# Altium PCB PCB_y262lpt v0.3b_2022-03-30.pcbdoc
Units mil, origin at the board's own origin, x right, y up, seen from the top; angles counter-clockwise.
Board outline 4055 x 3740 mil, 2 copper layers (Top Layer, Bottom Layer); 27 components, 38 nets, 162 pads, 8 vias.
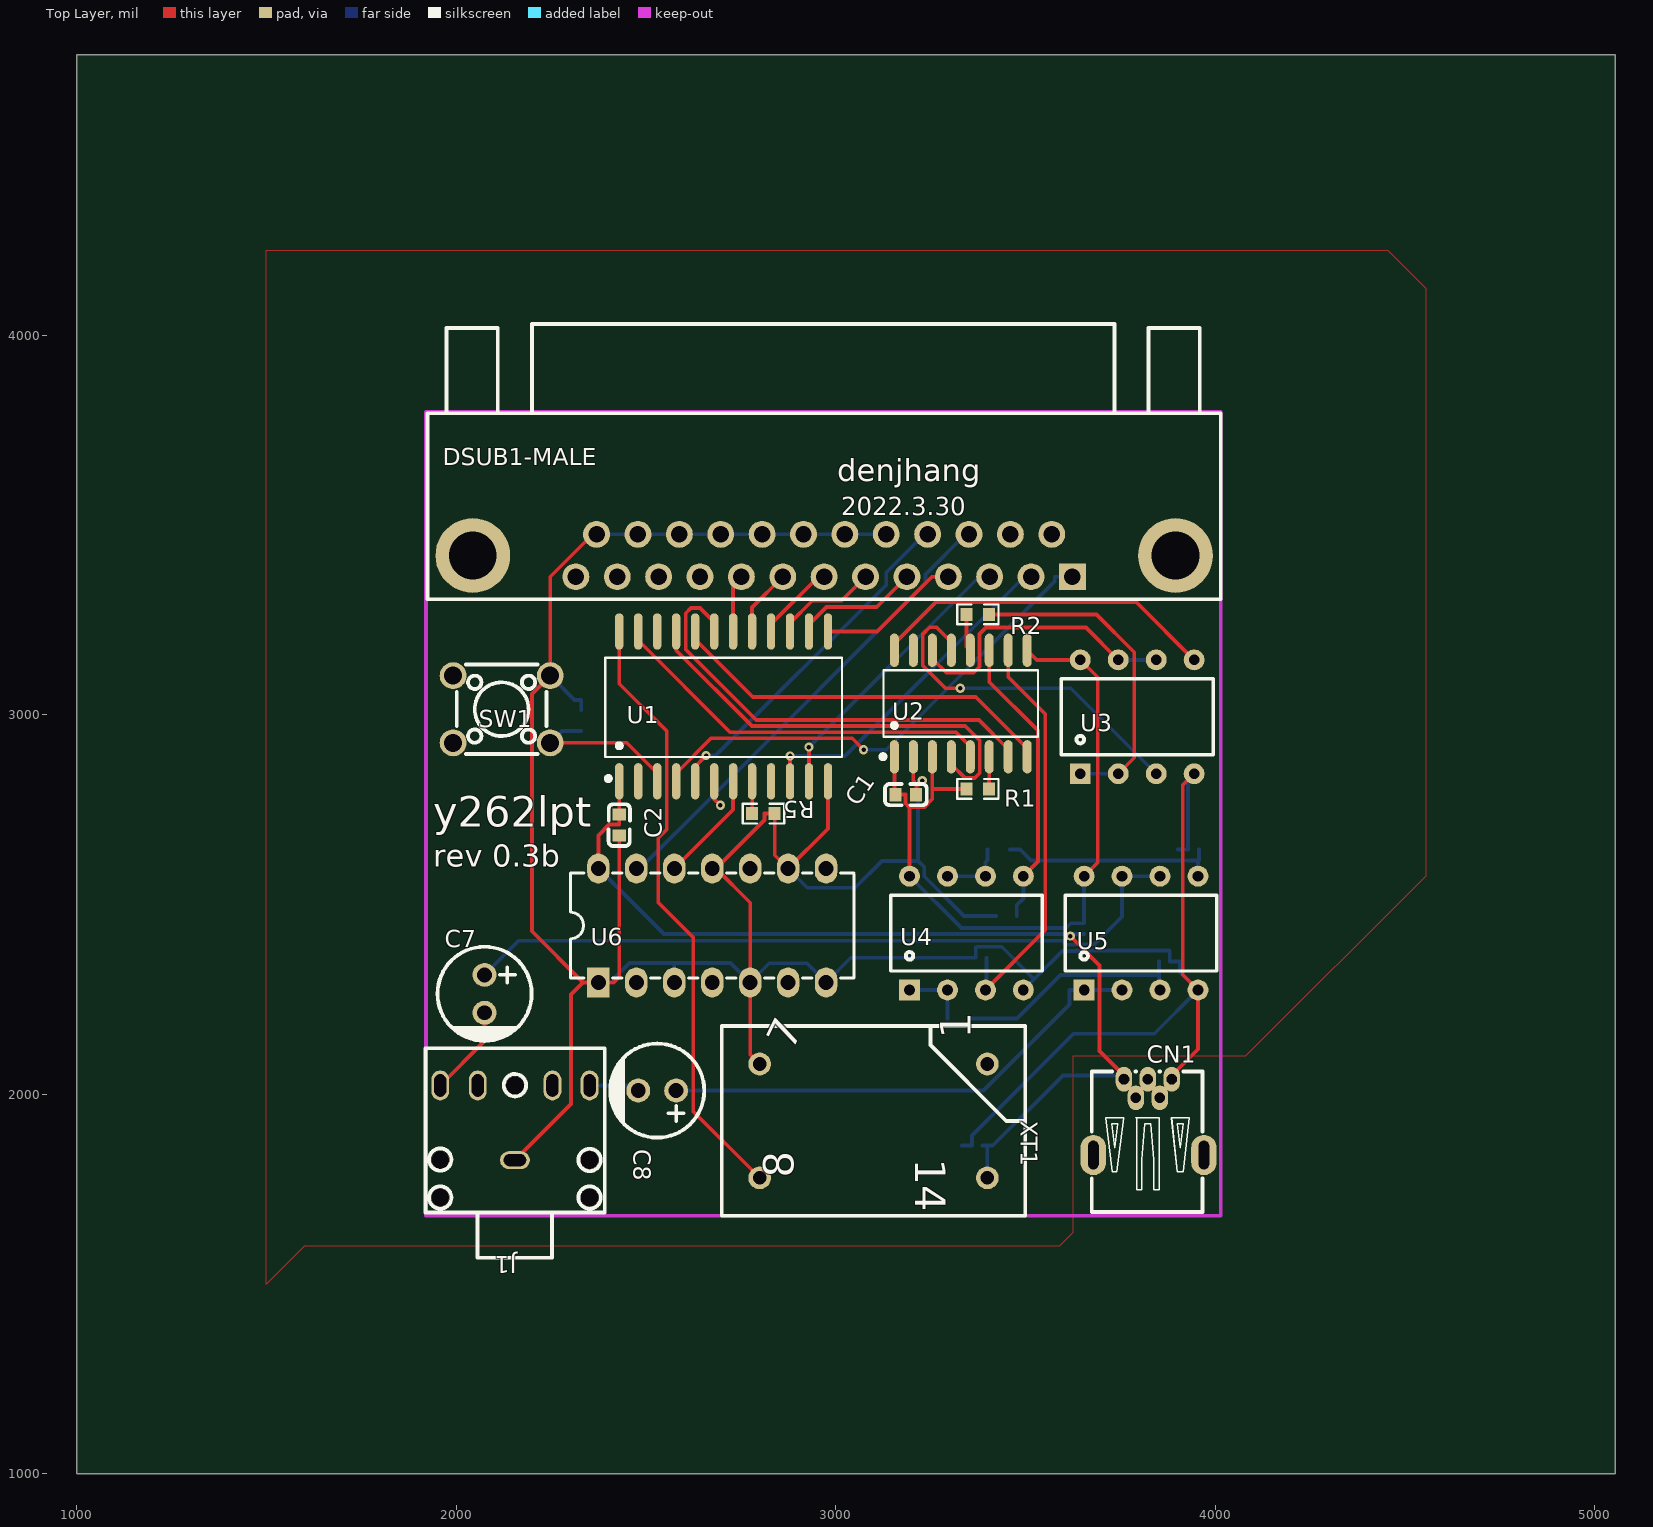
[diagram p0: Top Layer view]
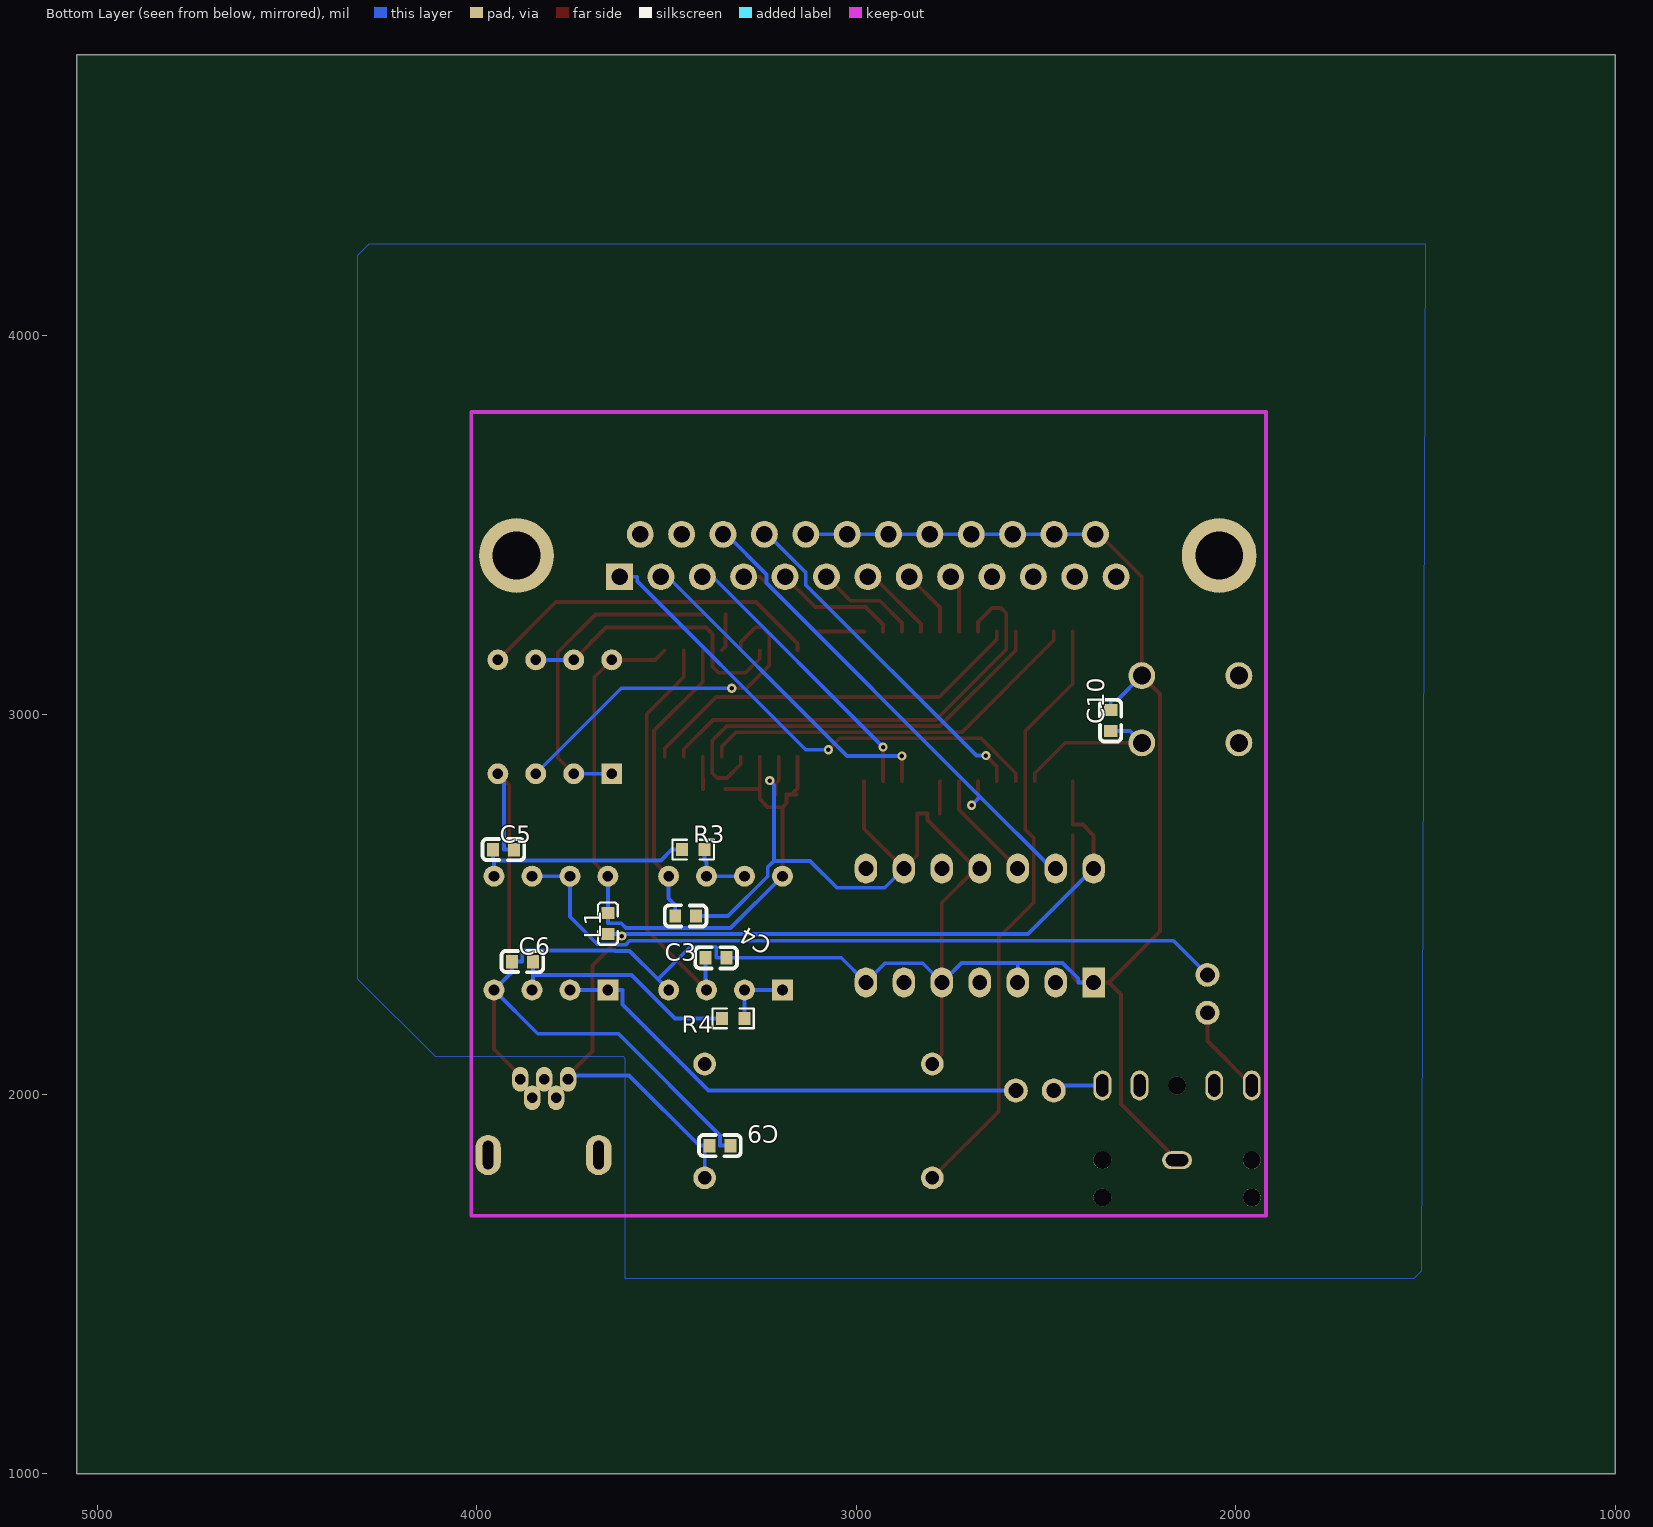
[diagram p1: Bottom Layer view, seen from below]

## Layer stack, top to bottom
Top Layer: signal copper (thickness not stored)
Dielectric: dielectric 12.6, FR-4, Dk 4.8
Bottom Layer: signal copper (thickness not stored)

## Board outline
5055,1000 1000,1000 1000,4740 5055,4740

## Components (designator, comment, footprint, x,y, rotation, side; value= is the part's Value field where it differs from the comment)
C1 "0.1u" C0603#1 3185,2790 r180 top
C2 "0.1u" C0603#1 2430,2710 r90 top
C3 "1.5n" C0603#2 3450,2470 r0 bottom
C4 "1.5n" C0603#2 3370,2360 r180 bottom
C5 "10n" C0603#2 3930,2645 r0 bottom
C6 "10n" C0603#2 3880,2350 r0 bottom
C7 "4.7uF" CAP-TH_BD6.3-P2.50-D1.0-FD 2075,2265 r270 top
C8 "4.7uF" CAP-TH_BD6.3-P2.50-D1.0-FD 2530,2010 r180 top
C9 "0.1u" C0603#2 3360,1865 r180 bottom
C10 "2.2n" C0603#2 2330,2985 r270 bottom
CN1 "54819-0519" USB-MINI-SMD_5P-P0.80-H-F_54819-0519 3825,1945 r0 top
DSUB1-MALE "FDB2501-M0DB300K6KA" DB25-TH_FDB2501-M0DB300K6KA 2969.96,3420.01 r180 top
J1 "PJ-307C" AUDIO-TH_PJ307C 2155,1925 r180 top
L1 "100Ω" L0603 3655,2450 r270 bottom
R1 "4.7k" R0603#1 3375,2805 r0 top
R2 "100R" R0603#1 3375,3265 r180 top
R3 "1.8k" R0603#2 3430,2645 r0 bottom
R4 "1.8k" R0603#2 3325,2200 r0 bottom
R5 "10k" R0603#1 2810,2740 r180 top
SW1 "C13828" SW-TH_4P-L6.0-W6.0-P4.50-LS6.5 2120,3015 r180 top
U1 "YMF262-M" YMF262-M 2705,3020 r0 top
U2 "YAC512" SOP-16_L10.3-W5.4-P1.27-LS7.8-BL 3330,3030 r0 top
U3 "SA5532AP" DIP8 3795,2995 r0 top
U4 "SA5532AP" DIP8 3345,2425 r0 top
U5 "SA5532AP" DIP8 3805,2425 r0 top
U6 "SN74HCT04N" DIP-14_L19.0-W7.0-P2.54-LS7.6-BL 2675,2445 r0 top
XT1 "TCXO-DIP14" TCXO-DIP-14-FOOT 3100,1930 r270 top

## Footprints (in the part's own frame and the unit in brackets; to place one, negate y for a bottom-side part, rotate by r counter-clockwise, add the part's x,y. Pads: shape width x height; smd on the part's side, far side on the other; paste and mask are expansions set on the pad)
AUDIO-TH_PJ307C [mm]
  oval 2x1.2 hole 0.8 slot 1.5 at 0 deg: 1(0,2.5)
  oval 1.2x2 hole 0.8 slot 1.5 at 90 deg: 2(5,-2.5) 3(2.489,-2.5) 4(-2.511,-2.5) 5(-5,-2.5)
  round 1.2 hole 1.2 unplated: ""(-5,5) ""(-5,2.5) ""(0,-2.5) ""(5,5) ""(5,2.5)
  silkscreen extent -6.01,-4.99 5.99,9.03
C0603#1 [mm]
  rect 0.8x0.9 smd: 1(-0.7,0) 2(0.7,0)
  silkscreen extent -1.41,-0.71 1.39,0.72
C0603#2 [mm]
  rect 0.8x0.9 smd: 1(0.7,0) 2(-0.7,0)
  silkscreen extent -1.39,-0.72 1.41,0.71
CAP-TH_BD6.3-P2.50-D1.0-FD [mm]
  round 1.6 hole 1: 1(-1.27,0) 2(1.27,0)
  silkscreen extent -3.15,-3.15 3.17,3.15
DB25-TH_FDB2501-M0DB300K6KA [mm]
  rect 1.8x1.8 hole 1.1: 1(-16.62,1.42)
  round 1.8 hole 1.1: 2(-13.85,1.42) 3(-11.08,1.42) 4(-8.31,1.42) 5(-5.54,1.42) 6(-2.77,1.42) 7(0,1.42) 8(2.77,1.42) 9(5.54,1.42) 10(8.31,1.42) 11(11.08,1.42) 12(13.85,1.42) 13(16.62,1.42) 14(-15.235,-1.42) 15(-12.465,-1.42) 16(-9.695,-1.42) 17(-6.925,-1.42) 18(-4.155,-1.42) 19(-1.385,-1.42) 20(1.385,-1.42) 21(4.155,-1.42) 22(6.925,-1.42) 23(9.695,-1.42) 24(12.465,-1.42) 25(15.235,-1.42)
  round 5 hole 3.2: 26(-23.52,0) 27(23.52,0)
  silkscreen extent -26.54,-15.49 26.54,2.92
DIP8 [mil]
  rect 55x55 hole 28: 1(-150,-150)
  round 55 hole 28: 2(-50,-150) 3(50,-150) 4(150,-150) 5(150,150) 6(50,150) 7(-50,150) 8(-150,150)
  silkscreen extent -200,-100 200,100
DIP-14_L19.0-W7.0-P2.54-LS7.6-BL [mm]
  rect 1.5x2 hole 1: 1(-7.62,-3.81)
  oval 1.5x2 hole 1: 2(-5.08,-3.81) 3(-2.54,-3.81) 4(0,-3.81) 5(2.54,-3.81) 6(5.08,-3.81) 7(7.62,-3.81) 8(7.62,3.81) 9(5.08,3.81) 10(2.54,3.81) 11(0,3.81) 12(-2.54,3.81) 13(-5.08,3.81) 14(-7.62,3.81)
  silkscreen extent -9.5,-3.5 9.5,3.5
L0603 [mm]
  rect 0.8x0.864 smd: 1(0.7,0) 2(-0.7,0)
  silkscreen extent -1.41,-0.67 1.42,0.65
R0603#1 [mil]
  rect 31.75x34.02 smd: 1(-29.66,0) 2(29.66,0)
  silkscreen extent -55,-26 55,26
R0603#2 [mil]
  rect 31.75x34.02 smd: 1(29.66,0) 2(-29.66,0)
  silkscreen extent -55,-26 55,26
SOP-16_L10.3-W5.4-P1.27-LS7.8-BL [mil]
  oval 23.7x87.83 smd: 1(-175,-140.37) 2(-125,-140.37) 3(-75,-140.37) 4(-25,-140.37) 5(25,-140.37) 6(75,-140.37) 7(125,-140.37) 8(175,-140.37) 9(175,140.37) 10(125,140.37) 11(75,140.37) 12(25,140.37) 13(-25,140.37) 14(-75,140.37) 15(-125,140.37) 16(-175,140.37)
  silkscreen extent -211,-146 204,87
SW-TH_4P-L6.0-W6.0-P4.50-LS6.5 [mm]
  round 1.8 hole 1.2: 1(-3.25,2.25) 2(3.25,2.25) 3(-3.25,-2.25) 4(3.25,-2.25)
  silkscreen extent -3,-3 3,3
TCXO-DIP-14-FOOT [mil]
  round 60 hole 36: 1(-150,300) 7(-150,-300) 8(150,-300) 14(150,300)
  silkscreen extent -250,-400 250,400
USB-MINI-SMD_5P-P0.80-H-F_54819-0519 [mm]
  oval 1.1x1.65 hole 0.7 slot 0.705 at 90 deg: 1(-1.65,2.409) 5(1.55,2.409)
  oval 1.1x1.65 hole 0.7: 2(-0.848,1.166) 3(-0.05,2.409) 4(0.752,1.166)
  oval 1.7x2.7 hole 0.7 slot 1.901 at 90 deg: 6(3.7,-2.664) 7(-3.7,-2.664)
  silkscreen extent -3.81,-6.48 3.6,2.92
YMF262-M [mm]
  oval 0.56x2.432 smd: 1(-6.985,-4.953) 2(-5.715,-4.953) 3(-4.445,-4.953) 4(-3.175,-4.953) 5(-1.905,-4.953) 6(-0.635,-4.953) 7(0.635,-4.953) 8(1.905,-4.953) 9(3.175,-4.953) 10(4.445,-4.953) 11(5.715,-4.953) 12(6.985,-4.953) 13(6.985,5.08) 14(5.715,5.08) 15(4.445,5.08) 16(3.175,5.08) 17(1.905,5.08) 18(0.635,5.08) 19(-0.635,5.08) 20(-1.905,5.08) 21(-3.175,5.08) 22(-4.445,5.08) 23(-5.715,5.08) 24(-6.985,5.08)
  silkscreen extent -7.92,-4.92 7.92,3.32

## Via types
v1: diameter 24.02, hole 12.01, Top Layer to Bottom Layer, tented both sides, 8 vias

## Nets (pads, with @x,y where several pads share a name; then routed paths per layer and width w, separated by ;. In a path a pad name is that pad's centre, name@x,y a point inside that pad or via, vN(x,y) a via of type N, cw(c..) or ccw(c..) an arc to the next point about the centre after c; other vN are vias at no path point)
/CS: R5.2 U1.8 | length 85.1
  Top Layer w10: U1.8 2780.34,2824.66 R5.2
/IC: C10.1 SW1.1 U1.3 | length 431.4
  Top Layer w10: SW1.1 2449.79,2926.42 2530,2846.21 U1.3
  Bottom Layer w10: SW1.1 2278.97,2957.44 C10.1
/RD: U1.7 U6.12 | length 294.2
  Top Layer w10: U6.12 2730,2750 U1.7
/WR: DSUB1-MALE.16 U1.6 U6.13 | length 1356.4
  Top Layer w10: U1.6 2680,2778.31 v1(2696.35,2761.96)
  Bottom Layer w10: U6.13 2484.72,2595 2674.02,2784.3 ; v1(2696.35,2761.96) 2674.02,2784.3 ; DSUB1-MALE.16@3351.65,3475.91 3342.69,3475.91 3236.93,3370.15 3236.93,3347.21 2674.02,2784.3
A0: DSUB1-MALE.1 U1.4 | length 1311.8
  Top Layer w10: U1.4 2580,2846.38 2671.98,2938.36 3043.99,2938.36 v1(3074.03,2908.32)
  Bottom Layer w10: v1(3074.03,2908.32) 3133.69,2908.32 3577.87,3352.5 3577.87,3364.1 DSUB1-MALE.1
A1: DSUB1-MALE.17 U1.5 | length 924.2
  Top Layer w10: U1.5 2630,2863.77 v1(2658.91,2892.68)
  Bottom Layer w10: v1(2658.91,2892.68) 2683.77,2892.68 3133.55,3342.46 3133.55,3375.33 3234.13,3475.91 DSUB1-MALE.17
A.VCC: C1.2 L1.2 R1.1 U2.1 U2.3 U2.9 U3.8 U4.8 U5.8 | length 2023.4
  Top Layer w10: U2.1 3155,2805.81 C1.2@3170.81,2790 ; C1.2 C1.2@3170.81,2790 ; U4.8 3195,2756.38 ; U2.3 3255,2805 ; R1.1 3318.48,2805 3255,2805 ; U2.9 3530.37,3145 U3.8 3690.85,3099.15 3690.85,2610.85 U5.8 ; C1.2@3170.81,2790 3184.18,2790 3184.18,2767.2 3195,2756.38 ; 3195,2756.38 3233.17,2756.38 3255,2778.21 3255,2805
  Bottom Layer w10: U4.8 3331.5,2438.5 3607.4,2438.5 3619.72,2450.82 3655.01,2450.82 L1.2 U5.8
AOUT: U2.13 U3.3 | length 936.3
  Top Layer w10: U2.13 3305,3191.91 3266,3230.91 3248.07,3230.91 3230,3212.84 3230,3129.55 3289.33,3070.22 v1(3328.74,3070.22)
  Bottom Layer w10: v1(3328.74,3070.22) 3619.78,3070.22 U3.3
CH1: C4.2 U2.10 U4.3 | length 1087.2
  Top Layer w10: U4.3 3552.72,2432.72 3552.72,3002.12 3455,3099.84 U2.10
  Bottom Layer w10: U4.3 3397.56,2277.56 C4.2
CH2: C3.1 U2.11 U4.5 | length 776.6
  Top Layer w10: U2.11 3405,3087.08 3533.29,2958.79 3533.29,2613.29 U4.5
  Bottom Layer w10: C3.1 3477.56,2498.71 3495,2516.15 U4.5
CV: U2.16 U3.5 | length 916.3
  Top Layer w10: U2.16 3155,3187.78 3265,3297.78 3792.22,3297.78 U3.5
D0: DSUB1-MALE.2 U1.10 | length 897.6
  Top Layer w10: U1.10 v1(2880,2891.66)
  Bottom Layer w10: v1(2880,2891.66) 3024.77,2891.66 3497.21,3364.1 DSUB1-MALE.2
D1: DSUB1-MALE.3 U1.11 | length 752.5
  Top Layer w10: v1(2929.91,2915.3) 2929.91,2825.09 U1.11
  Bottom Layer w10: v1(2929.91,2915.3) 3378.71,3364.1 DSUB1-MALE.3
D2: DSUB1-MALE.4 U1.13 | length 376.8
  Top Layer w10: U1.13 3109.72,3220 3253.82,3364.1 DSUB1-MALE.4
D3: DSUB1-MALE.5 U1.14 | length 328.5
  Top Layer w10: U1.14 2930,3238.37 2976.29,3284.66 3108.63,3284.66 DSUB1-MALE.5
D4: DSUB1-MALE.6 U1.15 | length 271.7
  Top Layer w10: U1.15 2880,3242.1 2938.62,3300.72 3015.64,3300.72 DSUB1-MALE.6
D5: DSUB1-MALE.7 U1.16 | length 211
  Top Layer w10: U1.16 2830,3239.39 2954.71,3364.1 DSUB1-MALE.7
D6: DSUB1-MALE.8 U1.17 | length 177.6
  Top Layer w10: U1.17 2780,3283.2 DSUB1-MALE.8
D7: DSUB1-MALE.9 U1.18 | length 153.2
  Top Layer w10: U1.18 2730,3342.25 DSUB1-MALE.9@2751.85,3364.1
DOAB: U1.21 U2.4 | length 1148.9
  Top Layer w10: U1.21 2580,3170.05 2779.59,2970.46 3341.78,2970.46 3380,2932.24 3380,2846.99 3366.88,2833.87 3340.89,2833.87 3305,2869.76 U2.4
GND: C1.1 C2.1 C3.2 C4.1 C5.2 C6.1 C9.1 C10.2 CN1.5 DSUB1-MALE.18 DSUB1-MALE.19 DSUB1-MALE.20 DSUB1-MALE.21 DSUB1-MALE.22 DSUB1-MALE.23 DSUB1-MALE.24 DSUB1-MALE.25 J1.1 R5.1 SW1.3 U1.12 U2.2 U3.4 U4.4 U5.4 U6.1 U6.3 U6.5 U6.7 U6.9 U6.11 XT1.7 | length 9325.9
  Top Layer w10: J1.1 2302.85,1974.42 2302.85,2263.37 2334.48,2295 ; DSUB1-MALE.25 2359.87,3475.91 2247.95,3363.99 SW1.3 2199.77,3055.4 2199.77,2429.71 2334.48,2295 ; C2.1 2430,2309.48 2415.52,2295 U6.1 2334.48,2295 ; U6.11 U6.11@2684.83,2595 ; XT1.7 2775,2105 U6.5 2775,2504.83 U6.11@2684.83,2595 ; U1.12 2980,2700 U6.9 2839.66,2630.34 R5.1 2812.79,2740 2812.79,2722.96 U6.11@2684.83,2595 ; U2.2 3205,2826.27 3212.56,2818.71 3212.56,2811.05 ; C1.1 3212.56,2811.05 ; v1(3228.42,2826.91) 3212.56,2811.05 ; CN1.5@3886.02,2049.86 3955,2118.84 U5.4 3915.01,2314.99 3915.01,2815.01 U3.4
  Bottom Layer w10: SW1.3 2312.23,3039.3 2330,3039.3 C10.2 ; DSUB1-MALE.25 DSUB1-MALE.24 DSUB1-MALE.23 DSUB1-MALE.22 DSUB1-MALE.21 DSUB1-MALE.20 DSUB1-MALE.19 DSUB1-MALE.18 ; U6.1 2415.52,2295 2415.52,2305.13 2456.85,2346.46 2575,2346.46 ; U6.3 2575,2346.46 ; U6.9 2925.55,2544.45 3051.22,2544.45 3122.14,2615.37 3217.56,2615.37 ; v1(3228.42,2826.91) 3217.56,2816.05 3217.56,2615.37 ; C9.1 3359.18,1865 3359.18,1891.74 3627.08,2159.64 3839.64,2159.64 U5.4 3908.71,2321.29 3907.56,2321.29 3907.56,2339.62 C6.1 3880.82,2350 3880.82,2376.74 3878.78,2378.78 3635.61,2378.78 3634.79,2377.96 3597.96,2377.96 3523.38,2303.38 ; C3.2 3338.62,2470 3233.86,2574.76 3233.86,2599.07 3217.56,2615.37 ; U4.4 3523.38,2303.38 ; C5.2 3929.18,2645 3929.18,2829.18 U3.4 ; 2575,2346.46 2723.54,2346.46 U6.5 2825.42,2345.42 2924.58,2345.42 U6.7 3040,2360 C4.1 3369.18,2360 3369.18,2386.74 3371.22,2388.78 3437.97,2388.78 3523.38,2303.38
M: U1.24 XT1.8 | length 1611.6
  Top Layer w10: U1.24 2430,3082.21 2555,2957.21 2555,2697.71 2532.82,2675.53 2532.82,2505.92 2625,2413.74 2625,1955 XT1.8
MP: U2.14 U3.6 U3.7 | length 762.9
  Top Layer w10: U2.14 3255,3148.11 3292.22,3110.89 3363.23,3110.89 3379.47,3127.13 3379.47,3213.19 3396.63,3230.35 3659.65,3230.35 U3.7
  Bottom Layer w10: U3.7 U3.6
OUT.L: C8.2 J1.5 | length 133.7
  Bottom Layer w10: J1.5@2351.85,2023.42 2466.58,2023.42 C8.2
OUT.R: C7.2 J1.2 | length 240
  Top Layer w10: J1.2 2075,2140.27 C7.2
SMPAC: U1.20 U2.8 | length 1037.1
  Top Layer w10: U1.20 2630,3198.79 2781.63,3047.16 3369.39,3047.16 3505,2911.55 U2.8
SMPBC: U1.19 U2.7 | length 1195.2
  Top Layer w10: U1.19 2680,3244.62 2642.57,3282.05 2619.11,3282.05 2605,3267.94 2605,3172.59 2791.08,2986.51 3378.04,2986.51 3455,2909.55 U2.7
SWIN: R2.2 U2.12 | length 98.6
  Top Layer w10: R2.2 3345.34,3180.03 U2.12
SY: U1.23 U2.5 | length 1041.7
  Top Layer w10: U1.23 2480,3196.6 2722.19,2954.41 3317.71,2954.41 3355,2917.12 U2.5
U2_6: R1.2 U2.6 | length 84.8
  Top Layer w10: R1.2 3404.66,2833 3405,2833.34 U2.6
U3_1: R2.1 U3.1 U3.2 | length 861.8
  Top Layer w10: R2.1 3687.6,3265 3787.29,3165.31 3787.29,2887.29 U3.2
  Bottom Layer w10: U3.1 U3.2
U4_1: R4.2 U4.1 U4.2 | length 175.1
  Bottom Layer w10: U4.1 U4.2 3295,2228.34 3295.34,2228 R4.2
U4_6: R3.2 U4.6 U4.7 | length 172.2
  Bottom Layer w10: U4.7 U4.6 3395,2611.66 3400.34,2617 R3.2
U5_1: C8.1 U5.1 U5.2 | length 1307.3
  Bottom Layer w10: C8.1 3390,2010 3616.51,2236.51 3616.51,2275 U5.1 U5.2
U5_3: C6.2 R4.1 U5.3 | length 621.4
  Bottom Layer w10: R4.1 3478.29,2200 3593.15,2314.86 3852.44,2314.86 ; C6.2 3852.44,2314.86 ; U5.3 3852.44,2277.56 3852.44,2314.86
U5_5: C5.1 R3.1 U5.5 | length 579.8
  Bottom Layer w10: R3.1 3486.52,2645 3515.3,2616.22 3955,2616.22 ; U5.5 3955,2616.22 ; C5.1 3957.56,2616.29 3955.07,2616.29 3955,2616.22
U5_6: C7.1 U5.6 U5.7 | length 1959.3
  Bottom Layer w10: C7.1 2164.83,2404.83 3598.21,2404.83 3609.03,2394.01 3628.14,2394.01 3629.76,2395.63 3682.61,2395.63 3755,2468.02 U5.7 U5.6
VCC: C2.2 C9.2 CN1.1 L1.1 U1.1 U6.14 XT1.14 | length 2585.2
  Top Layer w10: U6.14 2375,2682.56 2403.26,2710.82 2430,2710.82 C2.2 U1.1 ; v1(3618.58,2417.07) 3695.94,2339.71 3695.94,2113.96 CN1.1@3760.04,2049.86
  Bottom Layer w10: U6.14 2547.56,2422.44 v1@3618.58,2422.44 ; C9.2 C9.2@3400,1865 ; XT1.14 C9.2@3400,1865 ; v1(3618.58,2417.07) v1@3618.58,2422.44 ; L1.1 v1@3618.58,2422.44 ; CN1.1@3760.04,2049.86 3599.16,2049.86 3414.3,1865 C9.2@3400,1865
pads on no net: CN1.2 CN1.3 CN1.4 CN1.6 CN1.7 DSUB1-MALE.10 DSUB1-MALE.11 DSUB1-MALE.12 DSUB1-MALE.13 DSUB1-MALE.14 DSUB1-MALE.15 DSUB1-MALE.26 DSUB1-MALE.27 J1. J1.3 J1.4 SW1.2 SW1.4 U1.2 U1.9 U1.22 U2.15 U6.2 U6.4 U6.6 U6.8 U6.10 XT1.1

## Polygon pours and split planes (outlines as drawn)
GND on Top Layer (solid): 1500,4225 4455,4225 4555,4125 4555,2575 4080,2100 3625,2100 3625,1635 3590,1600 1600,1600 1500,1500
GND on Bottom Layer (solid): 1500,4240 4285,4240 4315,4210 4315,2305 4110,2100 3615,2100 3610,2095 3610,1515 1530,1515 1510,1535

## Silkscreen, mask and mechanical layers (free items; w line width, h text height)
Top Overlay:
  text "denjhang" at 3005,3615.47 h59.05
  text "2022.3.30" at 3015,3526.38 h47.24
  text "y262lpt" at 1940,2705 h80
  text "rev 0.3b" at 1940,2600.47 h59.05

## Text inside footprints (layer, text, board x,y; h text height)
XT1: Top Overlay "1" at 3356.53,2146.53 h80 r90; Top Overlay "7" at 2885.95,2112.47 h80 r64; Top Overlay "8" at 2890,1780 h80 r90; Top Overlay "14" at 3210,1830 h80 r270